# EAGLE board DualHBridge-IR2302-1.0 (EAGLE 6.4)
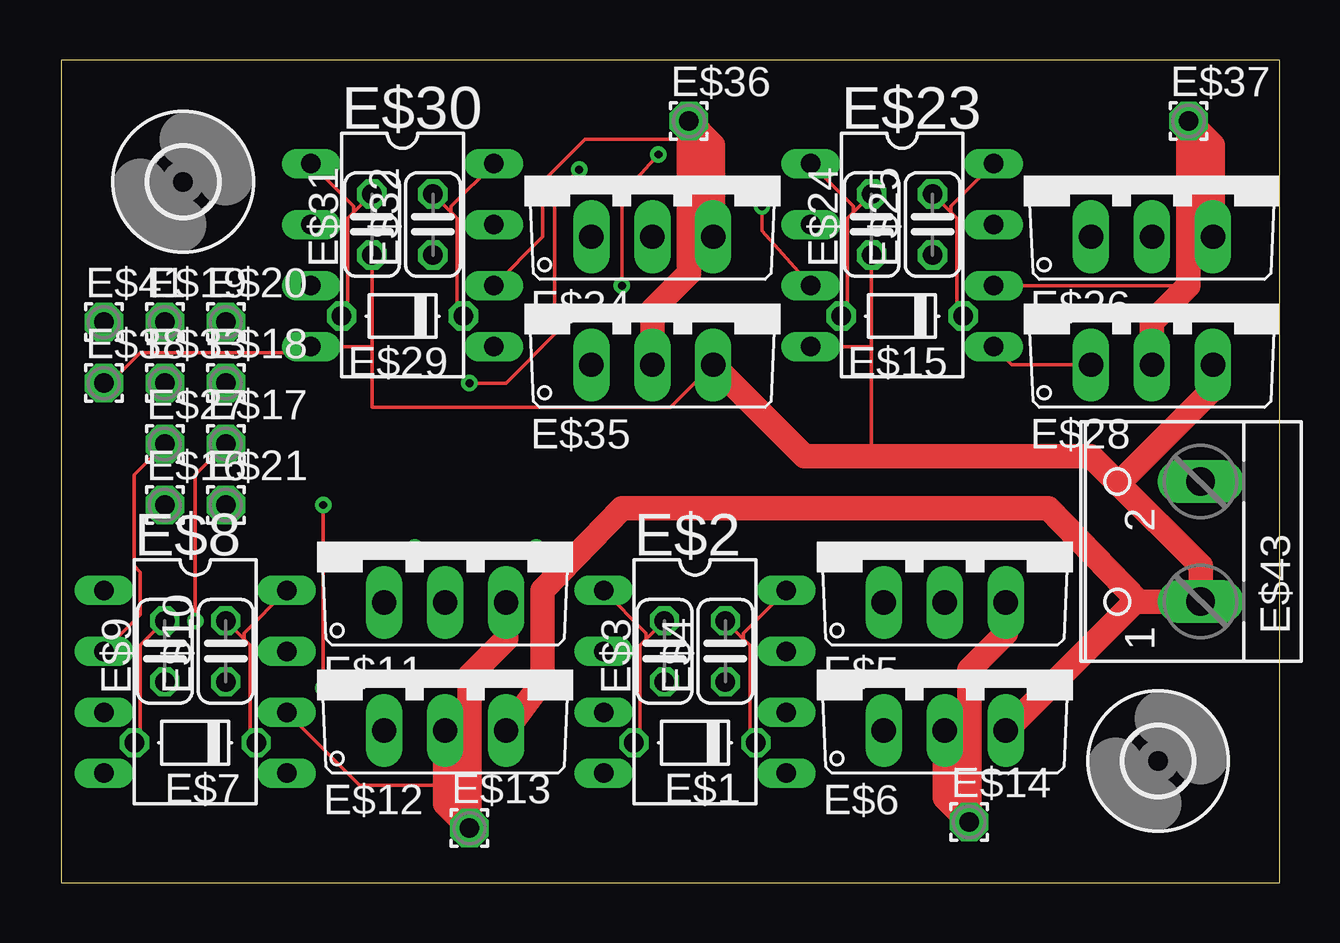
[diagram p0: board, top side]
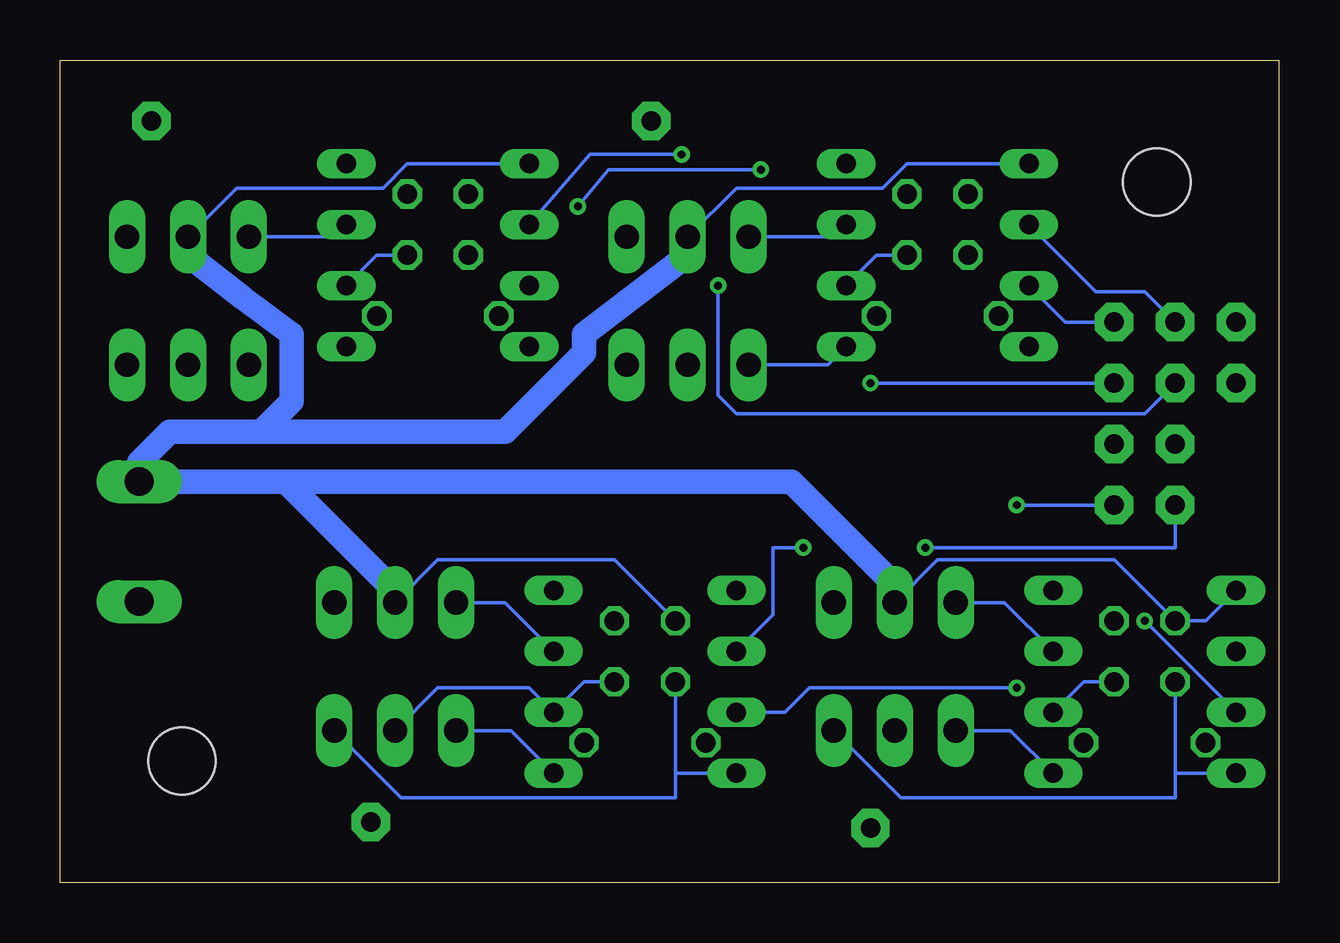
[diagram p1: board, bottom side, seen from below]

Size 50.8 x 34.29 mm. Coordinates in mm from the lower left corner, seen from the top.
Outline: 0,34.29 0,0 50.8,0 50.8,34.29 0,34.29
Copper layers (1*16): Top 0.0356mm / dielectric 1.5011mm / Bottom 0.0356mm
Design rules "LaenPCBOrder": minimum track width 6mil, minimum drill 13mil, track to track 6mil, track to pad 6mil, pad to pad 6mil, via to via 6mil, smd to smd 6mil, copper to edge 15mil, drill to drill 6mil, minimum pad ring 7mil, minimum via ring 7mil, stop-mask expansion 4mil, vias tented up to drill 0mil, thermal gap 10mil

## Footprints (pad centres in the part's own frame; a part is rotated, then mirrored left to right if it is on the bottom)
D-5 = drill 0.813 octagon: A 2.54,0; C -2.54,0
DIL8 = drill 0.813 long: 1 -3.81,-3.81; 2 -1.27,-3.81; 3 1.27,-3.81; 4 3.81,-3.81; 5 3.81,3.81; 6 1.27,3.81; 7 -1.27,3.81; 8 -3.81,3.81
C025-024X044 = drill 0.813 octagon: 1 -1.27,0; 2 1.27,0
TO220V = drill 1.016 long: 1 -2.54,-2.54; 2 0,-2.54; 3 2.54,-2.54
1,6/0,8 = drill 0.813 pad 1.6 octagon: 1 0,0
2,8 = hole 2.8: 0,0
W237-102 = drill 1.194 long: 1 -2.5,-1.27; 2 2.5,-1.27

## Placement (x,y rotation side)
E$1  [D-5]  26.42,5.84 180 top
E$2  [DIL8]  26.42,8.38 270 top
E$3  [C025-024X044]  25.15,9.65 90 top
E$4  [C025-024X044]  27.69,9.65 90 top
E$5  [TO220V]  36.83,14.22 0 top
E$6  [TO220V]  36.83,8.89 0 top
E$7  [D-5]  5.59,5.84 180 top
E$8  [DIL8]  5.59,8.38 270 top
E$9  [C025-024X044]  4.32,9.65 90 top
E$10  [C025-024X044]  6.86,9.65 90 top
E$11  [TO220V]  16,14.22 0 top
E$12  [TO220V]  16,8.89 0 top
E$13  [1,6/0,8]  17.02,2.29 0 top
E$14  [1,6/0,8]  37.85,2.54 0 top
E$15  [D-5]  35.05,23.62 180 top
E$16  [1,6/0,8]  4.32,15.75 0 top
E$17  [1,6/0,8]  6.86,18.29 0 top
E$18  [1,6/0,8]  6.86,20.83 0 top
E$19  [1,6/0,8]  4.32,23.37 0 top
E$20  [1,6/0,8]  6.86,23.37 0 top
E$21  [1,6/0,8]  6.86,15.75 0 top
E$23  [DIL8]  35.05,26.16 270 top
E$24  [C025-024X044]  33.78,27.43 90 top
E$25  [C025-024X044]  36.32,27.43 90 top
E$26  [TO220V]  45.47,29.46 0 top
E$27  [1,6/0,8]  4.32,18.29 0 top
E$28  [TO220V]  45.47,24.13 0 top
E$29  [D-5]  14.22,23.62 180 top
E$30  [DIL8]  14.22,26.16 270 top
E$31  [C025-024X044]  12.95,27.43 90 top
E$32  [C025-024X044]  15.49,27.43 90 top
E$33  [1,6/0,8]  4.32,20.83 0 top
E$34  [TO220V]  24.64,29.46 0 top
E$35  [TO220V]  24.64,24.13 0 top
E$36  [1,6/0,8]  26.16,31.75 0 top
E$37  [1,6/0,8]  46.99,31.75 0 top
E$38  [1,6/0,8]  1.78,20.83 0 top
E$40  [2,8]  5.08,29.21 0 top
E$41  [1,6/0,8]  1.78,23.37 0 top
E$42  [2,8]  45.72,5.08 0 top
E$43  [W237-102]  46.23,14.22 90 top

## Library data of the parts
E$1 E$7 E$15 E$29 = diode
E$2 E$8 E$23 E$30 = microchip
E$3 E$4 E$9 E$10 E$24 E$25 E$31 E$32 = rcl
E$5 E$6 E$11 E$12 E$26 E$28 E$34 E$35 = linear
E$13 E$14 E$16-E$21 E$27 E$33 E$36-E$38 E$41 = wirepad
E$40 E$42 = holes
E$43 = con-wago-500

## Nets
S$1: E$23.6 E$25.1 E$26.3 E$28.2 E$37.1
S$2: E$2.2 E$16.1
S$3: E$19.1 E$30.2
S$4: E$1.C E$2.8 E$4.2
S$5: E$2.3 E$21.1
S$7: E$2.7 E$5.1
S$8: E$2.5 E$6.1
S$9: E$1.A E$2.1 E$3.2 E$5.2 E$7.A E$8.1 E$9.2 E$11.2 E$15.A E$23.1 E$24.2 E$26.2 E$29.A E$30.1 E$31.2 E$34.2 E$43.2
S$10: E$20.1 E$30.3
S$11: E$23.2 E$33.1
S$12: E$7.C E$8.8 E$10.2
S$14: E$8.6 E$10.1 E$11.3 E$12.2 E$13.1
S$15: E$8.7 E$11.1
S$16: E$30.6 E$32.1 E$34.3 E$35.2 E$36.1
S$17: E$8.2 E$27.1
S$18: E$15.C E$23.8 E$25.2
S$19: E$18.1 E$23.3
S$20: E$2.6 E$4.1 E$5.3 E$6.2 E$14.1
S$21: E$23.7 E$26.1
S$22: E$23.5 E$28.1
S$25: E$29.C E$30.8 E$32.2
S$26: E$2.4 E$3.1 E$6.3 E$8.4 E$9.1 E$12.3 E$23.4 E$24.1 E$28.3 E$30.4 E$31.1 E$35.3 E$38.1 E$43.1
S$28: E$30.7 E$34.1
S$29: E$30.5 E$35.1
S$32: E$8.3 E$17.1
S$33: E$8.5 E$12.1

## Tracks (layer width: path | path; a pad name or v marks a point on that pad's centre or on a via)
S$1
  Top 0.152: 46.99,24.89 E$23.6
  Top 1.016: E$28.2 45.47,23.37 46.99,24.89 E$37.1 48.01,30.73 E$26.3
  Bottom 0.152: E$23.6 37.59,26.16 E$25.1
S$2  (via drill 0.33 pad 0.3)
  Top 0.152: v14.73,13.97 v19.81,13.97
  Bottom 0.152: v19.81,13.97 21.08,13.97 21.08,11.18 E$2.2 | v14.73,13.97 4.32,13.97 E$16.1
S$3
  Bottom 0.152: E$30.2 7.62,24.64 5.59,24.64 E$19.1
S$4
  Top 0.152: E$1.C 28.7,6.1 28.7,9.91 28.45,10.16 | E$4.2 28.45,10.16 | E$2.8 28.45,10.41 28.45,10.16
S$5  (via drill 0.33, 0.33 pad 0.3)
  Top 0.152: v10.92,15.75 v10.92,8.13
  Bottom 0.152: E$21.1 v10.92,15.75 | v10.92,8.13 19.56,8.13 20.57,7.11 E$2.3
S$7
  Bottom 0.152: E$2.7 32.26,11.68 E$5.1
S$8
  Bottom 0.152: E$2.5 32,6.35 E$6.1
S$9
  Top 0.152: E$1.A 24.13,6.1 24.13,9.91 24.38,10.16 | E$3.2 24.38,10.16 | E$2.1 24.38,10.41 24.38,10.16 | E$7.A 3.3,6.1 3.3,9.91 E$9.2 | E$23.1 33.02,28.19 33.02,27.94 | E$24.2 33.02,27.94 | 33.02,27.94 32.77,27.69 32.77,23.88 E$15.A | E$30.1 12.19,28.19 12.19,27.94 | E$31.2 12.19,27.94 | 12.19,27.94 11.94,27.69 11.94,23.88 E$29.A
  Bottom 0.152: E$5.2 35.05,13.46 27.69,13.46 E$3.2 | E$8.1 3.05,10.92 E$9.2 6.86,13.46 14.22,13.46 E$11.2 | E$26.2 43.43,28.96 37.34,28.96 36.32,29.97 E$23.1 | E$34.2 22.61,28.96 16.51,28.96 15.49,29.97 E$30.1
  Bottom 0.406: 36.87,16.72 36.83,16.51
  Bottom 0.914: 41.4,16.72 36.87,16.72
  Bottom 1.016: 41.4,16.72 E$43.2 47.5,17.53 46.23,18.8 42.42,18.8 | 41.4,16.72 20.32,16.72 16,12.41 E$11.2 | E$26.2 45.47,26.16 43.18,24.38 41.15,22.86 41.15,20.07 42.42,18.8 | E$34.2 24.64,26.16 28.96,22.86 28.96,22.1 32.26,18.8 42.42,18.8 | E$5.2 36.83,12.15 41.4,16.72
S$10
  Bottom 0.152: E$30.3 8.89,23.37 E$20.1
S$11  (via drill 0.33 pad 0.3)
  Top 0.152: v23.37,24.89 23.37,28.7 23.62,28.96 v24.89,30.35
  Bottom 0.152: E$33.1 5.59,19.56 22.61,19.56 23.37,20.32 v23.37,24.89 | v24.89,30.35 28.7,30.35 E$23.2
S$12
  Top 0.152: E$7.C 7.87,6.1 7.87,9.91 7.62,10.16 | E$10.2 7.62,10.16 | E$8.8 7.62,10.41 7.62,10.16
S$14
  Top 0.152: E$8.6 12.45,4.06 16,4.06
  Top 1.016: 17.02,4.06 16,4.06 | E$11.3 18.54,10.16 17.02,8.64 E$13.1 16,3.3 16,4.06 | 16,4.06 E$12.2
  Bottom 0.152: E$8.6 8.13,8.38 E$10.1
S$15
  Bottom 0.152: E$8.7 11.43,11.68 E$11.1
S$16
  Top 0.152: E$30.6 20.07,26.92 20.07,29.21 21.84,30.99 25.91,30.99 E$36.1
  Top 0.914: 27.18,26.42 E$34.3
  Top 1.016: E$34.3 27.18,30.73 E$36.1 26.16,25.4 24.64,23.88 E$35.2
  Bottom 0.152: E$30.6 16.76,26.16 E$32.1
S$17
  Top 0.152: E$8.2 3.3,11.18 3.3,12.95 3.05,13.21 3.05,17.02 E$27.1
S$18
  Top 0.152: E$15.C 37.34,23.88 37.34,27.69 37.08,27.94 | E$25.2 37.08,27.94 | E$23.8 37.08,28.19 37.08,27.94
S$19  (via drill 0.33 pad 0.3)
  Top 0.152: v17.02,20.83 18.54,20.83 20.57,22.86 20.57,28.7 v21.59,29.72 | v29.21,28.19 29.21,27.18 E$23.3
  Bottom 0.152: E$18.1 v17.02,20.83 | v29.21,28.19 27.94,29.72 v21.59,29.72
S$20
  Top 1.016: E$5.3 39.37,10.41 37.85,8.89 E$14.1 36.83,3.56 E$6.2
  Bottom 0.152: E$4.1 28.96,8.38 E$2.6 31.24,8.13 35.05,8.13 E$6.2
S$21
  Bottom 0.152: E$23.7 39.37,26.92 E$26.1
S$22
  Top 0.152: E$23.5 39.62,21.59 E$28.1
S$25
  Top 0.152: E$29.C 16.51,23.88 16.51,27.69 16.26,27.94 | E$32.2 16.26,27.94 | E$30.8 16.26,28.19 16.26,27.94
S$26
  Top 0.152: 33.78,22.35 E$23.4 | E$24.1 33.78,22.35 | 33.78,22.35 33.78,17.78 | 12.95,22.35 E$30.4 10.16,22.1 3.3,22.1 2.03,20.83 E$38.1 | E$31.1 12.95,22.35 | E$35.3 25.4,19.81 12.95,19.81 12.95,22.35
  Top 0.813: 44.92,11.72 44.74,11.72
  Top 0.914: 43.94,16.76 44.2,16.76
  Top 1.016: E$12.3 20.07,8.38 20.07,12.19 23.37,15.62 41.15,15.62 44.92,11.72 E$43.1 47.5,13.21 43.94,16.76 42.93,17.78 33.78,17.78 30.99,17.78 E$35.3 | 44.74,11.72 E$6.3 | 44.2,16.76 48.01,20.57 E$28.3
  Bottom 0.152: 25.15,4.57 E$2.4 | E$3.1 25.15,4.57 | E$6.3 36.58,3.56 25.15,3.56 25.15,4.57 | 4.32,4.57 E$8.4 | E$9.1 4.32,4.57 | E$12.3 15.75,3.56 4.32,3.56 4.32,4.57
S$28
  Bottom 0.152: E$30.7 18.54,26.92 E$34.1
S$29
  Bottom 0.152: E$30.5 18.8,21.59 E$35.1
S$32  (via drill 0.33)
  Top 0.152: v5.59,10.92 5.59,17.02 E$17.1
  Bottom 0.152: v5.59,10.92 E$8.3
S$33
  Bottom 0.152: E$8.5 11.18,6.35 E$12.1

## Text on the board
tNames: Dual H-Bridge | O1 | O2 | IR2302 | IR2302 | Logic In | VCC | H1 | EN1 | GND | H2 | EN2 | H3 | EN3 | VDD | H4 | EN4 | Power In | GND | IR2302 | IR2302 | O3 | O4 | Brent M. Spell